# EAGLE board Etch Wallet - ground pour (EAGLE 9.6.1), part 1 of 2
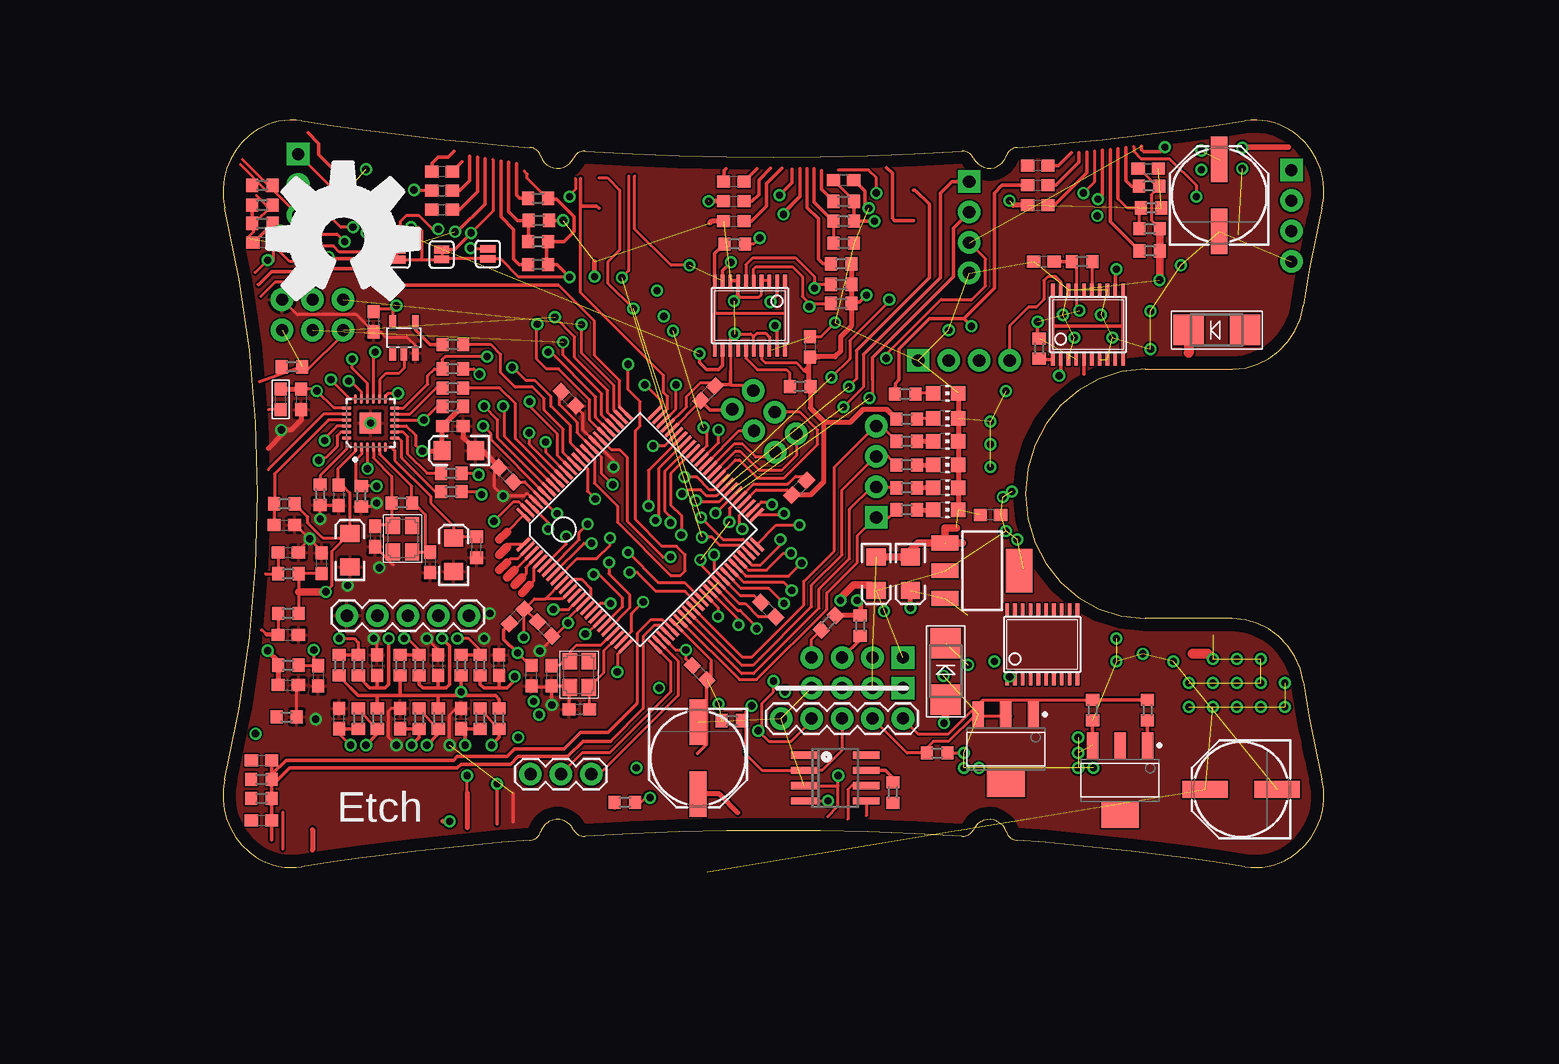
[diagram p0: board, top side]
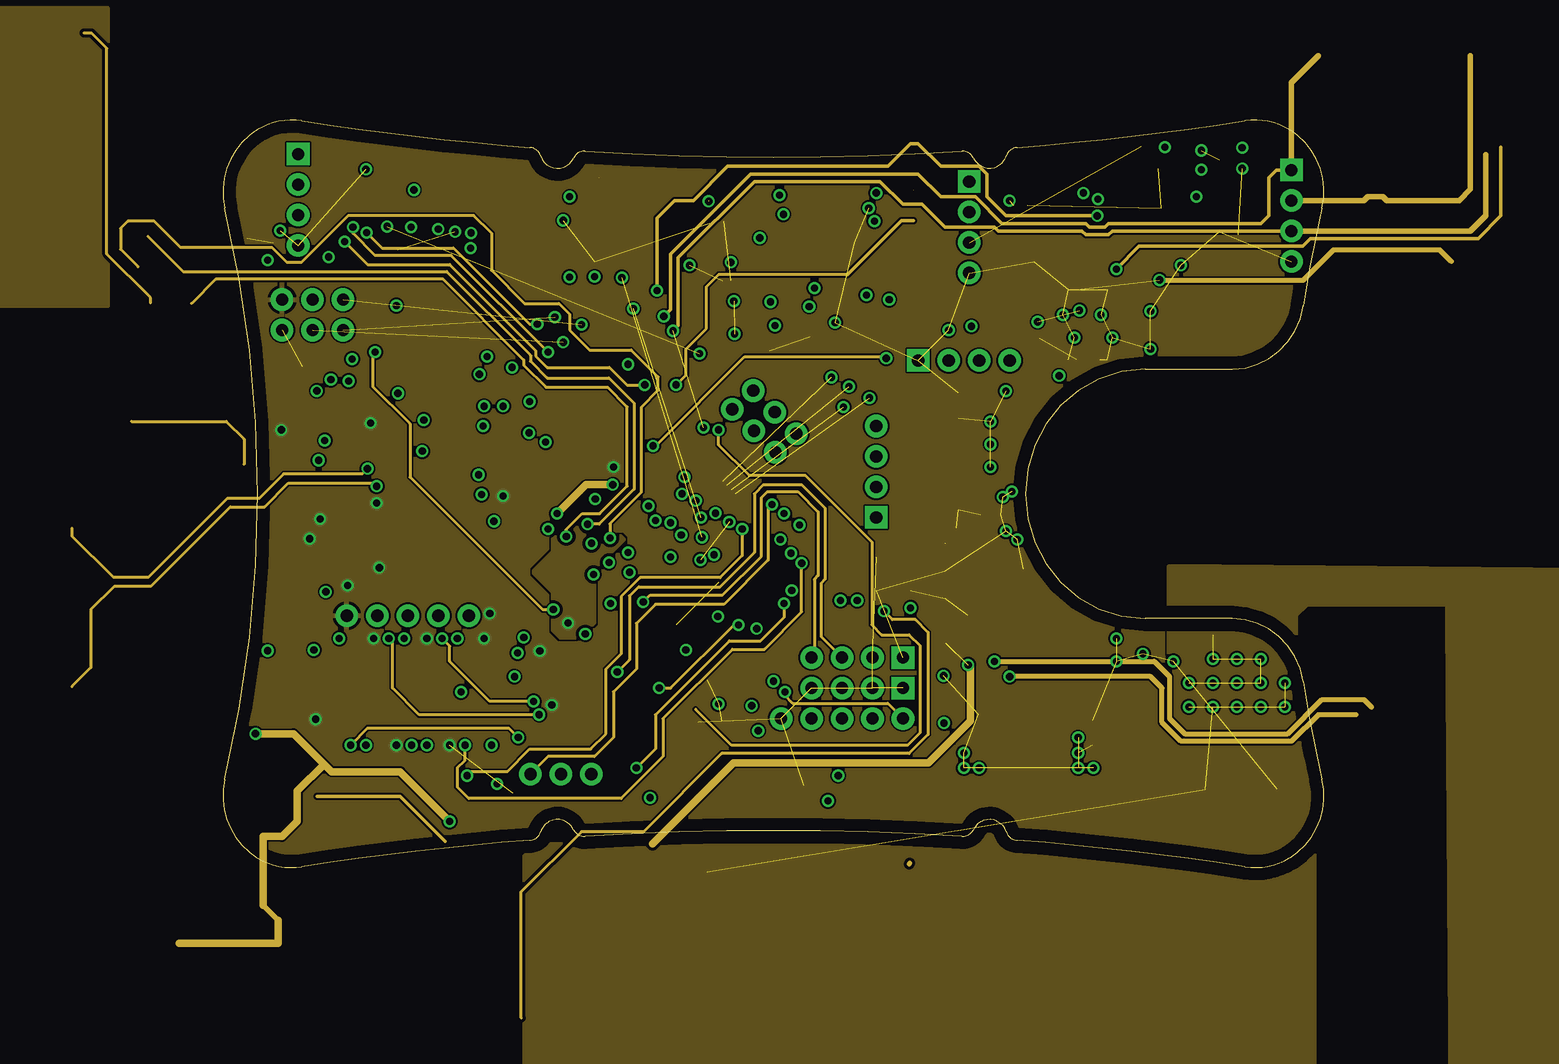
[diagram p1: board, inner layer Route2]
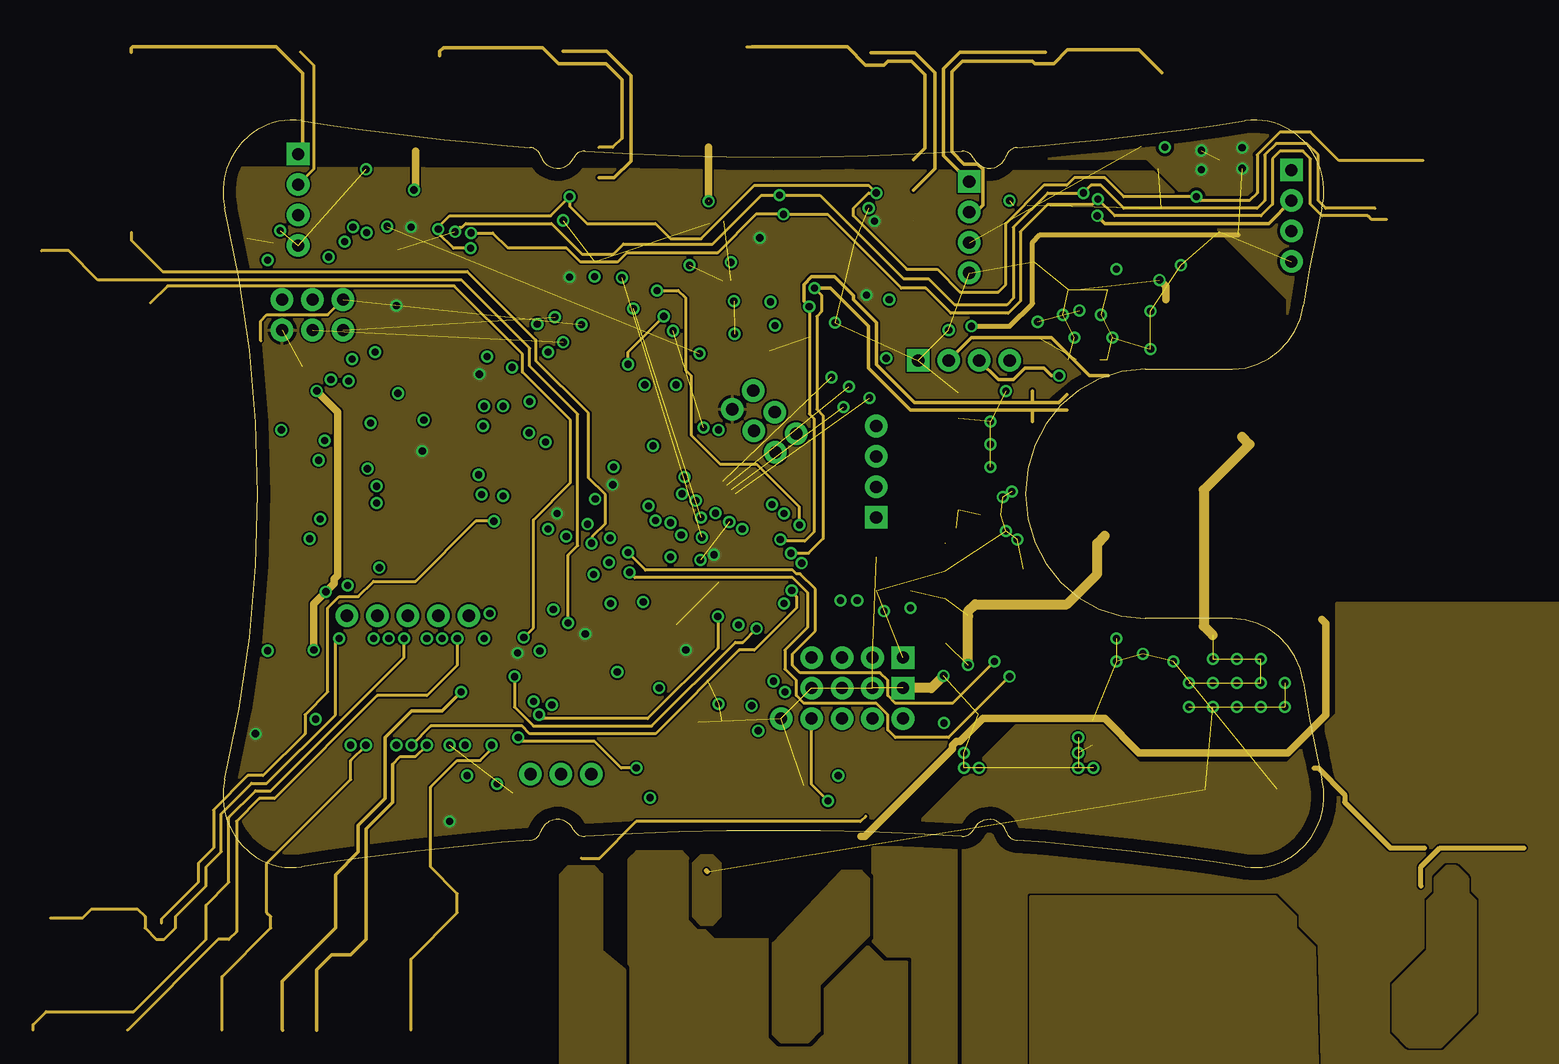
[diagram p2: board, inner layer Route15]
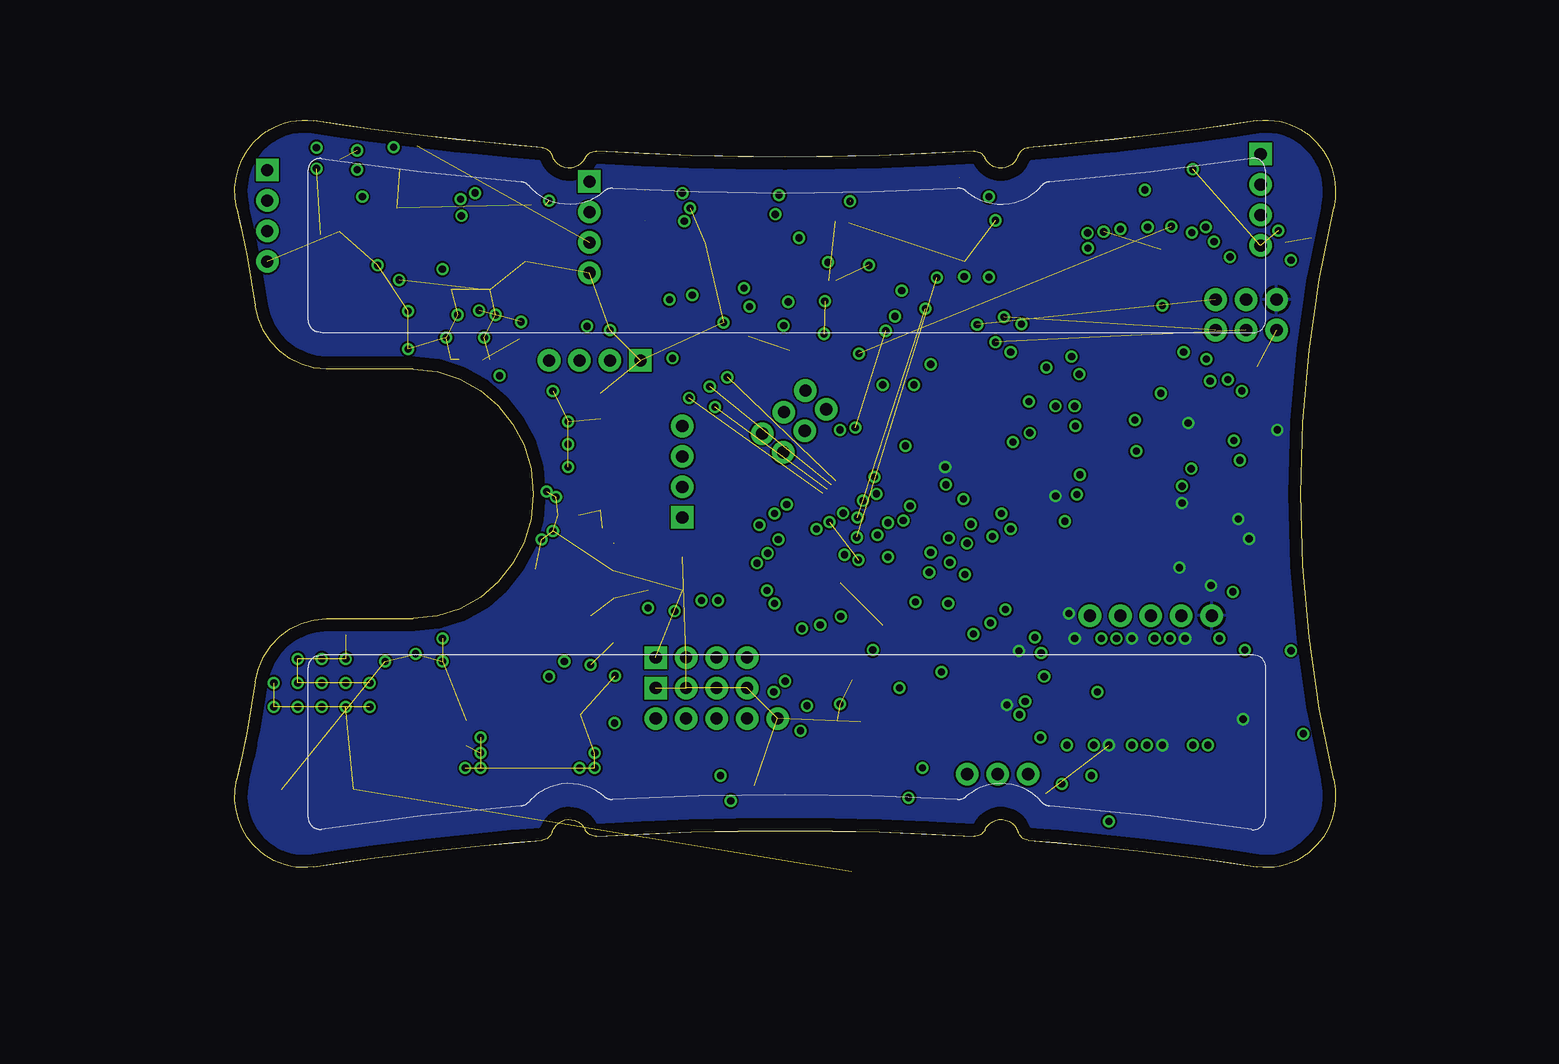
[diagram p3: board, bottom side, seen from below]

Size 91.76 x 62.31 mm. Coordinates in mm from the lower left corner, seen from the top.
Outline: 62.54,59.15 62.47,59.28 62.38,59.4 62.27,59.5 62.15,59.58 62.02,59.64 61.89,59.69 61.74,59.71 61.6,59.72 57.67,59.51 53.74,59.36 49.81,59.27 45.88,59.24 41.95,59.27 38.02,59.36 34.09,59.51 30.16,59.72 30.01,59.71 29.87,59.69 29.74,59.64 29.61,59.58 29.49,59.5 29.38,59.4 29.29,59.28 29.21,59.15 29.14,59.02 29.06,58.9 28.97,58.79 28.87,58.69 28.76,58.6 28.64,58.52 28.51,58.45 28.38,58.39 28.08,58.32 27.79,58.31 27.5,58.35 27.23,58.46 26.99,58.61 26.77,58.81 26.59,59.06 26.46,59.34 26.41,59.48 26.33,59.61 26.24,59.73 26.13,59.82 26.01,59.91 25.88,59.97 25.74,60.01 25.6,60.03 23.21,60.23 20.83,60.46 18.44,60.7 16.06,60.97 13.68,61.25 11.31,61.56 8.93,61.9 6.56,62.25 6.08,62.3 5.6,62.31 5.12,62.28 4.65,62.21 4.18,62.09 3.73,61.94 3.29,61.74 2.86,61.51 2.77,61.45 2.68,61.39 2.59,61.33 2.5,61.27 2.41,61.21 2.33,61.14 2.24,61.08 2.16,61.01 1.55,60.43 1.04,59.78 0.62,59.06 0.3,58.3 0.1,57.49 0,56.66 0.02,55.82 0.15,54.97 1.35,49.07 2.2,43.13 2.71,37.15 2.88,31.16 2.71,25.16 2.2,19.19 1.35,13.24 0.15,7.34 0.02,6.5 0,5.65 0.1,4.82 0.3,4.02 0.62,3.25 1.04,2.53 1.55,1.88 2.16,1.3 2.24,1.23 2.33,1.17 2.41,1.1 2.5,1.04 2.59,0.98 2.68,0.92 2.77,0.86 2.86,0.8 3.29,0.57 3.73,0.37 4.18,0.22 4.65,0.11 5.12,0.03 5.6,0 6.08,0.01 6.56,0.06 8.93,0.42 11.31,0.75 13.68,1.06 16.06,1.35 18.44,1.61 20.83,1.86 23.21,2.08 25.6,2.28 25.74,2.3 25.88,2.34 26.01,2.41 26.13,2.49 26.24,2.59 26.33,2.7 26.41,2.83 26.46,2.97 26.52,3.1 26.58,3.24 26.66,3.36 26.75,3.47 26.85,3.58 26.95,3.68 27.07,3.76 27.19,3.83 27.48,3.95 27.77,4 28.06,4 28.34,3.93 28.6,3.81 28.84,3.64 29.05,3.42 29.21,3.16 29.29,3.03 29.38,2.91 29.49,2.81 29.61,2.73 29.74,2.67 29.87,2.62 30.01,2.6 30.16,2.6 34.09,2.81 38.02,2.96 41.95,3.05 45.88,3.08 49.81,3.05 53.74,2.96 57.67,2.81 61.6,2.6 61.74,2.6 61.89,2.62 62.02,2.67 62.15,2.73 62.27,2.81 62.38,2.91 62.47,3.03 62.54,3.16 62.62,3.29 62.7,3.41 62.79,3.52 62.89,3.62 63,3.71 63.12,3.79 63.25,3.86 63.38,3.92 63.67,3.99 63.97,4 64.25,3.96 64.53,3.85 64.77,3.7 64.99,3.5 65.16,3.25 65.29,2.97 65.35,2.83 65.43,2.7 65.52,2.59 65.63,2.49 65.75,2.41 65.88,2.34 66.01,2.3 66.16,2.28 68.55,2.08 70.93,1.86 73.32,1.61 75.7,1.35 78.07,1.06 80.45,0.75 82.82,0.42 85.19,0.06 85.68,0.01 86.16,0 86.63,0.03 87.11,0.11 87.57,0.22 88.03,0.37 88.47,0.57 88.9,0.8 88.99,0.86 89.08,0.92 89.17,0.98 89.26,1.04 89.35,1.1 89.43,1.17 89.52,1.23 89.6,1.3 90.21,1.88 90.72,2.53 91.14,3.25 91.45,4.02 91.66,4.82 91.76,5.65 91.74,6.5 91.61,7.34 91.38,8.35 91.16,9.36 90.95,10.38 90.75,11.4 90.56,12.41 90.38,13.43 90.21,14.46 90.05,15.48 89.79,16.58 89.35,17.59 88.75,18.48 88.02,19.26 87.18,19.89 86.23,20.36 85.21,20.65 84.12,20.76 76.88,20.76 74.86,20.97 72.99,21.57 71.29,22.53 69.81,23.8 68.59,25.34 67.66,27.11 67.08,29.06 66.88,31.16 67.08,33.25 67.66,35.2 68.59,36.97 69.81,38.51 71.29,39.78 72.99,40.74 74.86,41.34 76.88,41.56 84.12,41.56 85.21,41.66 86.23,41.95 87.18,42.42 88.02,43.05 88.75,43.83 89.35,44.73 89.79,45.73 90.05,46.83 90.21,47.86 90.38,48.88 90.56,49.9 90.75,50.92 90.95,51.93 91.16,52.95 91.38,53.96 91.61,54.97 91.74,55.82 91.76,56.66 91.66,57.49 91.45,58.3 91.14,59.06 90.72,59.78 90.21,60.43 89.6,61.01 89.52,61.08 89.43,61.14 89.35,61.21 89.26,61.27 89.17,61.33 89.08,61.39 88.99,61.45 88.9,61.51 88.47,61.74 88.03,61.94 87.57,62.09 87.11,62.21 86.63,62.28 86.16,62.31 85.68,62.3 85.19,62.25 82.82,61.9 80.45,61.56 78.07,61.25 75.7,60.97 73.32,60.7 70.93,60.46 68.55,60.23 66.16,60.03 66.01,60.01 65.88,59.97 65.75,59.91 65.63,59.82 65.52,59.73 65.43,59.61 65.35,59.48 65.29,59.34 65.24,59.21 65.17,59.08 65.1,58.95 65.01,58.84 64.91,58.73 64.8,58.64 64.69,58.55 64.56,58.48 64.28,58.36 63.99,58.31 63.7,58.32 63.42,58.38 63.16,58.5 62.92,58.67 62.71,58.89 62.54,59.15
Copper layers (1*16): Top 0.035mm / dielectric 1.5mm / Bottom 0.035mm
Design rules "default": minimum track width 6mil, minimum drill 0.35mm, track to track 6mil, track to pad 6mil, pad to pad 6mil, via to via 6mil, smd to smd 6mil, copper to edge 40mil, drill to drill 6mil, minimum pad ring 10mil, minimum via ring 8mil, stop-mask expansion 4mil, vias tented up to drill 0mil, thermal gap 10mil

## Footprints (pad centres in the part's own frame; a part is rotated, then mirrored left to right if it is on the bottom)
C0603 = smd 1.1 x 1: 1 -0.85,0; 2 0.85,0
EIA3216 = smd 1.4 x 1.6: A 1.4,0; C -1.4,0
PANASONIC_E = smd 3.8 x 1.4: + 3,0; - -3,0
C0603K = smd 1.05 x 1.08: 1 -0.875,0; 2 0.875,0
SMADIODE = smd 2.54 x 2.54: A 2.349,0; C -2.349,0
0603 = smd 1.1 x 1: 1 -0.85,0; 2 0.85,0
LQFP100 = smd 0.27 x 1.5: 1 -6,-7.75; 2 -5.5,-7.75; 3 -5,-7.75; 4 -4.5,-7.75; 5 -4,-7.75; 6 -3.5,-7.75; 7 -3,-7.75; 8 -2.5,-7.75; 9 -2,-7.75; 10 -1.5,-7.75; 11 -1,-7.75; 12 -0.5,-7.75; 13 0,-7.75; 14 0.5,-7.75; 15 1,-7.75; 16 1.5,-7.75; 17 2,-7.75; 18 2.5,-7.75; 19 3,-7.75; 20 3.5,-7.75; 21 4,-7.75; 22 4.5,-7.75; 23 5,-7.75; 24 5.5,-7.75; 25 6,-7.75; 51 6,7.75; 52 5.5,7.75; 53 5,7.75; 54 4.5,7.75; 55 4,7.75; 56 3.5,7.75; 57 3,7.75; 58 2.5,7.75; 59 2,7.75; 60 1.5,7.75; 61 1,7.75; 62 0.5,7.75; 63 0,7.75; 64 -0.5,7.75; 65 -1,7.75; 66 -1.5,7.75; 67 -2,7.75; 68 -2.5,7.75; 69 -3,7.75; 70 -3.5,7.75; 71 -4,7.75; 72 -4.5,7.75; 73 -5,7.75; 74 -5.5,7.75; 75 -6,7.75 | smd 1.5 x 0.27: 26 7.75,-6; 27 7.75,-5.5; 28 7.75,-5; 29 7.75,-4.5; 30 7.75,-4; 31 7.75,-3.5; 32 7.75,-3; 33 7.75,-2.5; 34 7.75,-2; 35 7.75,-1.5; 36 7.75,-1; 37 7.75,-0.5; 38 7.75,0; 39 7.75,0.5; 40 7.75,1; 41 7.75,1.5; 42 7.75,2; 43 7.75,2.5; 44 7.75,3; 45 7.75,3.5; 46 7.75,4; 47 7.75,4.5; 48 7.75,5; 49 7.75,5.5; 50 7.75,6; 76 -7.75,6; 77 -7.75,5.5; 78 -7.75,5; 79 -7.75,4.5; 80 -7.75,4; 81 -7.75,3.5; 82 -7.75,3; 83 -7.75,2.5; 84 -7.75,2; 85 -7.75,1.5; 86 -7.75,1; 87 -7.75,0.5; 88 -7.75,0; 89 -7.75,-0.5; 90 -7.75,-1; 91 -7.75,-1.5; 92 -7.75,-2; 93 -7.75,-2.5; 94 -7.75,-3; 95 -7.75,-3.5; 96 -7.75,-4; 97 -7.75,-4.5; 98 -7.75,-5; 99 -7.75,-5.5; 100 -7.75,-6
TSSOP20 = smd 0.305 x 0.991: 1 -2.925,-2.918; 2 -2.275,-2.918; 3 -1.625,-2.918; 4 -0.975,-2.918; 5 -0.325,-2.918; 6 0.325,-2.918; 7 0.975,-2.918; 8 1.625,-2.918; 9 2.275,-2.918; 10 2.925,-2.918; 11 2.925,2.918; 12 2.275,2.918; 13 1.625,2.918; 14 0.975,2.918; 15 0.325,2.918; 16 -0.325,2.918; 17 -0.975,2.918; 18 -1.625,2.918; 19 -2.275,2.918; 20 -2.925,2.918
SOT23-5 = smd 0.55 x 1.2: 1 -0.95,-1.3; 2 0,-1.3; 3 0.95,-1.3; 4 0.95,1.3; 5 -0.95,1.3
QFN24_4MM = smd 0.8 x 0.28: 1 -2,1.25; 2 -2,0.75; 3 -2,0.25; 4 -2,-0.25; 5 -2,-0.75; 6 -2,-1.25; 13 2,-1.25; 14 2,-0.75; 15 2,-0.25; 16 2,0.25; 17 2,0.75; 18 2,1.25 | smd 0.28 x 0.8: 7 -1.25,-2; 8 -0.75,-2; 9 -0.25,-2; 10 0.25,-2; 11 0.75,-2; 12 1.25,-2; 19 1.25,2; 20 0.75,2; 21 0.25,2; 22 -0.25,2; 23 -0.75,2; 24 -1.25,2 | smd 1.778 x 1.778: THERM 0,0
SOT223 = smd 1.219 x 2.235: 1 -2.311,-3.099; 2 0,-3.099; 3 2.311,-3.099 | smd 3.6 x 2.2: 4 0,3.099
SOIC8 = smd 0.6 x 2.2: 1 -1.905,-2.6; 2 -0.635,-2.6; 3 0.635,-2.6; 4 1.905,-2.6; 5 1.905,2.6; 6 0.635,2.6; 7 -0.635,2.6; 8 -1.905,2.6
1X04_NO_SILK = drill 1.016 pad 1.88 square: 1 0,0 | drill 1.016 pad 1.88: 2 2.54,0; 3 5.08,0; 4 7.62,0
1X03_NO_SILK = drill 1.016 pad 1.88: 1 0,0; 2 2.54,0; 3 5.08,0
1X03 = drill 1.016 pad 1.88: 1 0,0; 2 2.54,0; 3 5.08,0
SJ_2S = smd 0.635 x 1.27: 1 -0.412,0; 2 0.412,0
1X05 = drill 1.016 pad 1.88: 1 0,0; 2 2.54,0; 3 5.08,0; 4 7.62,0; 5 10.16,0
CHIP-LED0805 = smd 1.2 x 1.2: A 0,-1.05; C 0,1.05
CRYSTAL_3.2X2.5 = smd 1.4 x 1.2: 1 -1.1,-0.8; 2 1.1,0.8; GND1 -1.1,0.8; GND2 1.1,-0.8
SOT230P700X160-4N = smd 2.15 x 0.95: 1 -2.9,2.3; 2 -2.9,0; 3 -2.9,-2.3 | smd 2.15 x 3.15: 4 2.9,0
R0603 = smd 1 x 1.1: 1 -0.85,0; 2 0.85,0

## Placement (x,y rotation side)
C2  12pF  [C0603]  27.4,15.98 270 top
C3  12pF  [C0603]  29.69,13.19 180 top
C4  18pF  [C0603]  3.21,8.93 0 top
C5  18pF  [C0603]  3.21,3.91 0 top
C6  .1uF  [C0603]  26.81,19.9 315 top
C7  10uF  [EIA3216]  54.45,24.49 270 top
C8  .1uF  [C0603]  48.04,31.66 225 top
C9  .1uF  [C0603]  45.43,21.5 135 top
C10  .1uF  [C0603]  39.72,16.23 135 top
C11  .1uF  [C0603]  23.59,32.74 315 top
C12  .1uF  [C0603]  28.8,39.09 135 top
C13  .1uF  [C0603]  25.7,15.99 90 top
C14  .1uF  [C0603]  40.42,39.54 225 top
C16  .22uF  [C0603]  18.26,54.84 0 top
C18  .1uF  [C0603]  18.26,56.43 0 top
C20  .1uF  [C0603]  18.26,58.02 180 top
C25  .1uF  [C0603]  3.33,52.11 180 top
C31  .1uF  [C0603]  48.93,43.41 270 top
C32  .22uF  [C0603]  42.58,53.89 0 top
C33  .22uF  [C0603]  67.91,55.22 0 top
C34  .1uF  [C0603]  42.58,55.54 0 top
C35  .1uF  [C0603]  67.91,56.87 0 top
C36  .1uF  [C0603]  42.58,57.19 180 top
C37  .1uF  [C0603]  67.91,58.52 180 top
C38  .1uF  [C0603]  51.72,57.32 0 top
C41  .1uF  [C0603]  77.12,58.27 0 top
C42  100uF  [PANASONIC_E]  83.04,56.04 90 top
C44  .1uF  [C0603]  12.54,45.51 270 top
C45  10uF  [EIA3216]  10.57,26.46 90 top
C46  .1uF  [C0603]  9.62,31.03 270 top
C47  .1uF  [C0603]  6.51,39.03 270 top
C48  1uF  [EIA3216]  19.21,26.08 90 top
C49  470pF  [C0603K]  21.11,26.71 270 top
C50  10uF  [EIA3216]  19.65,34.78 180 top
C51  .1uF  [C0603]  19.15,36.81 0 top
C52  .1uF  [C0603]  8.22,25.38 90 top
C53  .1uF  [C0603]  7.91,15.98 270 top
C54  18pF  [C0603]  5.11,28.55 0 top
C55  18pF  [C0603]  5.43,26.27 0 top
C56  18pF  [C0603]  5.43,15.22 0 top
C57  18pF  [C0603]  5.43,19.41 0 top
C58  12pF  [C0603]  17.24,25.44 270 top
C59  12pF  [C0603]  12.67,27.6 270 top
C60  100uF  [PANASONIC_E]  39.59,9.12 270 top
C63  100uF  [PANASONIC_E]  84.87,6.52 180 top
C64  10uF  [EIA3216]  57.31,24.49 270 top
C65  .1uF  [C0603]  63.97,29.4 180 top
C68  .1uF  [C0603]  68.42,50.52 0 top
C78  .1uF  [C0603]  12.86,16.87 90 top
C79  .1uF  [C0603]  17.94,16.87 90 top
C80  .1uF  [C0603]  23.02,16.87 90 top
C81  .1uF  [C0603]  9.68,12.42 90 top
C82  .1uF  [C0603]  14.76,12.42 90 top
C83  .1uF  [C0603]  19.84,12.42 90 top
D1  MBRA210LT3  [SMADIODE]  60.23,16.36 270 top
D2  MBRA210LT3  [SMADIODE]  82.84,44.81 0 top
FB1  [0603]  4.79,39.03 90 top
IC1  LPC1769  [LQFP100]  34.77,28.17 315 top
IC2  MCP44X1  [TSSOP20]  68.29,18.6 0 top
IC4  MCP44X1  [TSSOP20]  43.91,46.02 180 top
IC7  [SOT23-5]  15.08,44.17 0 top
IC8  [QFN24_4MM]  12.29,37.06 90 top
IC9  MCP44X1  [TSSOP20]  72.1,45.27 0 top
IC10  LM1117-3.3V  [SOT223]  63.28,24.74 270 top
IC14  TC4427  [SOIC8]  51.02,7.47 270 top
JP1  [1X04_NO_SILK]  56.67,17.5 180 top
JP2  [1X03_NO_SILK]  42.45,38.2 315 top
JP3  [1X03_NO_SILK]  47.78,36.17 135 top
JP4  [1X03_NO_SILK]  4.92,44.81 0 top
JP6  [1X03_NO_SILK]  10,47.35 180 top
JP7  [1X04_NO_SILK]  6.26,59.48 270 top
JP10  [1X04_NO_SILK]  56.67,14.96 180 top
JP15  [1X04_NO_SILK]  62.2,57.19 270 top
JP18  [1X04_NO_SILK]  89.06,58.14 270 top
JP20  [1X03]  30.7,7.79 180 top
JP29  [1X04_NO_SILK]  54.45,29.19 90 top
JP30  [SJ_2S]  18.21,51.11 270 top
JP31  [SJ_2S]  14.56,51.1 90 top
JP32  [1X05]  20.48,21 180 top
JP33  [1X05]  56.67,12.42 180 top
JP34  [1X04_NO_SILK]  57.94,42.27 0 top
JP36  [SJ_2S]  22.07,51.16 270 top
L1  [0603]  24.48,20.93 225 top
LED1  [CHIP-LED0805]  60.23,29.82 270 top
LED2  [CHIP-LED0805]  60.23,31.66 270 top
LED3  [CHIP-LED0805]  60.23,33.57 270 top
LED4  [CHIP-LED0805]  60.23,35.54 270 top
LED9  [CHIP-LED0805]  60.23,37.44 270 top
LED10  [CHIP-LED0805]  60.23,39.54 270 top
Q2  12MHz  [CRYSTAL_3.2X2.5]  29.69,16.11 90 top
Q3  25MHz  [CRYSTAL_3.2X2.5]  14.95,27.41 270 top
Q8  ZXMN4A06  [SOT230P700X160-4N]  65.25,9.88 270 top
Q9  ZXMN4A06  [SOT230P700X160-4N]  74.77,7.28 270 top
R2  10K  [R0603]  5.73,41.75 0 top
R4  100K  [R0603]  71.6,50.52 180 top
R5  2.2k  [R0603]  50.46,20.42 45 top
R6  2.2k  [R0603]  53.12,20.17 90 top
R8  33R  [R0603]  3.21,5.76 0 top
R9  33R  [R0603]  3.21,7.34 0 top
R10  1k  [R0603]  56.99,29.82 180 top
R11  1k  [R0603]  56.99,31.66 180 top
R12  1k  [R0603]  56.99,33.57 180 top
R13  1k  [R0603]  56.99,35.54 180 top
R18  33K  [R0603]  68.03,43.26 90 top
R22  NP  [R0603]  3.27,55.22 180 top
R23  NP  [R0603]  26.26,52.17 0 top
R24  10K  [R0603]  3.27,56.87 0 top
R26  10K  [R0603]  3.27,53.7 0 top
R27  10K  [R0603]  26.32,53.95 0 top
R28  10K  [R0603]  26.26,55.79 0 top
R29  10K  [R0603]  26.26,50.27 0 top
R30  33K  [R0603]  42.64,51.98 0 top
R35  2.2k  [R0603]  51.53,48.62 0 top
R36  2.2k  [R0603]  51.53,47.03 0 top
R37  100K  [R0603]  48.1,40.11 0 top
R38  NP  [R0603]  51.72,53.89 0 top
R39  NP  [R0603]  77.25,53.25 0 top
R40  10K  [R0603]  51.72,52.05 0 top
R41  10K  [R0603]  51.72,55.54 0 top
R42  10K  [R0603]  51.53,50.33 0 top
R43  10K  [R0603]  77.36,54.99 0 top
R44  10K  [R0603]  77.18,56.81 0 top
R45  10K  [R0603]  77.25,51.41 0 top
R50  330R  [R0603]  5.3,12.55 180 top
R51  22R  [R0603]  19.15,43.6 0 top
R52  1.5K  [R0603]  19.15,41.57 0 top
R53  10K  [R0603]  19.15,38.46 0 top
R54  49.9R  [R0603]  5.11,30.33 180 top
R55  49.9R  [R0603]  5.43,24.49 180 top
R56  49.9R  [R0603]  5.43,16.87 180 top
R57  49.9R  [R0603]  5.43,21.19 180 top
R58  22R  [R0603]  19.02,32.87 0 top
R59  22R  [R0603]  19.02,31.35 0 top
R60  22R  [R0603]  19.15,39.98 0 top
R62  10K  [R0603]  11.53,30.97 90 top
R63  12.1K  [R0603]  8.1,31.09 90 top
R64  1M  [R0603]  14.89,30.39 180 top
R69  22R  [R0603]  55.84,6.25 270 top
R71  10k  [R0603]  42.41,12.24 0 top
R72  10k  [R0603]  33.5,5.44 0 top
R74  10k  [R0603]  59.53,9.54 0 top
R75  22R  [R0603]  77.06,13.12 90 top
R76  10k  [R0603]  72.49,13.12 270 top
R77  1k  [R0603]  56.99,37.38 180 top
R78  8.2K  [R0603]  56.86,39.47 180 top
R92  5k6  [R0603]  11.27,16.87 270 top
R93  1k  [R0603]  9.68,16.87 270 top
R94  1k  [R0603]  14.76,16.87 270 top
R95  5k6  [R0603]  16.35,16.87 270 top
R96  1k  [R0603]  19.84,16.87 270 top
R97  5k6  [R0603]  21.43,16.87 270 top
R98  1k  [R0603]  12.86,12.42 90 top
R99  5k6  [R0603]  11.27,12.42 270 top
R100  1k  [R0603]  17.94,12.42 90 top
R101  5k6  [R0603]  16.35,12.42 270 top
R102  1k  [R0603]  23.02,12.42 90 top
R103  5k6  [R0603]  21.43,12.42 270 top
U$8  OSHW-LOGOH  [OSHW-LOGO-HUGE]  10,52.43 0 top

## Library data of the parts
C2-C6 C8-C14 C16 C18 C20 C25 C31-C38 C41 C68 C78-C83 = rcl
C7 C42 C45 C48 C50 C60 C64 IC10 JP1-JP4 JP6 JP7 JP10 JP15 JP18 JP20 JP29-JP34 JP36 L1 = SparkFun
C44 C46 C47 C49 C51-C59 C65 R2 R4-R6 R8-R13 R18 R22-R24 R26-R30 R35-R45 R50-R60 R62-R64 R69 R71 R72 R74-R78 R92-R103 = resistor
C63 = SparkFun-Capacitors
D1 D2 FB1 IC1 IC7 IC8 Q2 Q3 = microbuilder
IC2 IC4 IC9 = Geos
IC14 = custom_esorensen
LED1-LED4 LED9 LED10 = led
Q8 Q9 = ipc-7351-transistor
U$8 = logxen

## Nets
3.3V: C8.2 C9.2 C10.2 C11.2 C12.2 C13.2 C14.2 C31.2 C38.1 C44.1 C50.A C51.1 IC1.19 IC1.28 IC1.42 IC1.54 IC1.71 IC1.84 IC1.96 IC4.17 IC7.5 IC8.9 JP2.1 JP4.1 JP30.2 JP31.1 JP36.2 L1.2 R2.2 R23.2 R28.2 R29.2 R30.2 R35.2 R36.2 R37.2 R38.2 R41.2 R42.2 R52.2 R53.2 R77.2
5V: C64.A D1.C IC10.3
+5V: D2.A
AGND: C6.2 IC1.11 IC1.15
AVCC: C6.1 IC1.10 IC1.12 L1.1
DIR1: IC1.80 JP7.2
DIR2: IC1.49
DIR3: IC1.58
DIR4: IC1.56 JP15.2
DIR5: IC1.50 JP18.2
EN1: IC1.81 JP7.1
EN2: IC1.48
EN3: IC1.59
EN4: IC1.57 JP15.1
EN5: IC1.85 JP18.1
ENET_CRS: IC1.92 R60.2
ENET_MDC: IC1.87
ENET_MDIO: IC1.86
ENET_REF_CLK: IC1.88 R51.2
ENET_RX_ER: IC1.89
ENET_RXD0: IC1.91
ENET_RXD1: IC1.90
ENET_TX_EN: IC1.93
ENET_TXD0: IC1.95
ENET_TXD1: IC1.94
ETA_CURRENT: IC9.2 JP34.3
GND: C2.2 C3.2 C11.1 C12.1 C13.1 C44.2 C45.C C46.2 C47.2 C48.C C49.2 C50.C C51.2 C52.2 C53.2 C54.2 C55.2 C56.2 C57.2 C58.2 C59.2 C78.2 C79.2 C80.2 C81.2 C82.2 C83.2 IC1.83 IC1.97 IC7.3 IC8.THERM JP6.3 JP32.5 R50.1 R62.1 R63.1
ISP_BOOT: IC1.53
JTAG-RTCK: IC1.100
JTAG-TCK: IC1.5
JTAG-TDI: IC1.2
JTAG-TDO: IC1.1
JTAG-TMS: IC1.3
JTAG-TRST: IC1.4
LED1: IC1.32 JP29.1 R10.2
LED1/REGOFF: IC8.3
LED2: IC1.33 JP29.2 R11.2
LED2/NINTSEL: IC8.2 R62.2
LED3: IC1.34 JP29.3 R12.2
LED4: IC1.35 JP29.4 R13.2
MISO1: IC1.61 JP3.1
MOSFET_DRIVE: C60.+
MOSI1: IC1.60 JP3.2
MS1: JP31.2
MS2: JP30.1
MS3: JP36.1
N$1: C2.1 IC1.22 Q2.2
N$2: C3.1 IC1.23 Q2.1
N$3: C20.2
N$4: C20.1
N$5: IC14.7 R69.1
N$7: C18.2
N$13: IC4.15 R37.1
N$15: IC4.1 IC4.10 IC4.11 IC4.20 R30.1
N$16: LED10.A R78.1
N$17: R23.1 R27.1
N$18: Q9.4
N$21: C45.A C46.1 C47.1 C52.1 C53.1 FB1.2 IC8.1 IC8.19 R54.1 R55.1 R56.1 R57.1
N$22: C16.2
N$24: R28.1
N$25: C36.2
N$26: C36.1
N$27: C34.2
N$29: IC9.15 R4.1
N$35: R29.1
N$36: R42.1
N$37: R38.1 R40.1
N$38: C32.2
N$39: R45.1
N$40: R41.1
N$42: IC8.8 R58.1
N$43: C37.1
N$44: C35.2
N$53: R39.1 R43.1
N$54: C33.2
N$55: IC8.7 R59.1
N$56: IC9.1 IC9.10 IC9.11 IC9.20 R18.1
N$57: R44.1
N$63: IC8.11 R60.1
N$67: C59.1 IC8.4 Q3.1 R64.2
N$68: C58.1 IC8.5 Q3.2 R64.1
N$69: IC8.24 R63.2
N$74: Q8.1
N$75: Q9.1 R75.1
N$77: IC7.2 IC8.14
N$78: IC7.4 R51.1
N$80: LED9.A R77.1
N$82: C48.A C49.1 IC8.6
N$84: LED4.A R13.1
N$85: LED3.A R12.1
N$86: LED2.A R11.1
N$87: LED1.A R10.1
N$88: Q8.4
N$106: R22.2 R26.1
N$114: R94.1 R95.1
N$115: R93.2 R94.2 R96.2 R98.2 R100.2 R102.2
N$116: R96.1 R97.1
N$117: R98.1 R99.1
N$118: R102.1 R103.1
N$119: R100.1 R101.1
N$122: R92.1 R93.1
N$124: R5.2 R6.2
P0W: IC4.12
P1_22: IC1.36
P1_23: IC1.37
P1W: IC4.9
P2.6: JP33.1 R75.2 R76.1
P2.7: IC14.4 JP33.4
P2.9: IC1.64
P2W: IC4.19
P3W: IC4.2
PLAY: IC1.51
POT_SCL: IC1.47 IC4.5 R36.1
POT_SDA: IC1.46 IC4.6 R35.1
PW5: IC9.12
PWM0: JP33.2 R74.1
PWM1: IC14.2 JP33.3 R71.2
RD+: IC8.23
RD-: IC8.22
RESET: IC1.17
RSTOUT: IC1.14 IC8.15
RX_0: IC1.99
S$3: C41.1 C68.2 IC9.4 IC9.17 R4.2 R18.2 R39.2 R44.2 R45.2
S$4: C63.+
S$5: C16.1
S$6: C33.1 C41.2 R43.2
S$7: C7.C C8.1 C9.1 C10.1 C14.1 C31.1 C32.1 C38.2 C42.- C60.- C63.- C64.C C65.2 C68.1 IC1.31 IC1.41 IC1.55 IC1.72 IC4.3 IC4.4 IC4.7 IC4.8 IC4.13 IC4.16 IC4.18 IC9.3 IC9.7 IC9.8 IC9.13 IC9.16 IC9.18 IC10.1 IC14.3 JP1.2 JP3.3 JP10.1 JP10.2 JP10.3 JP10.4 JP15.4 JP18.4 JP33.5 JP34.1 LED1.C LED2.C LED3.C LED4.C LED9.C LED10.C Q8.3 Q9.3 R27.2 R40.2 R71.1 R74.2 R76.2
S$9: IC9.5
S$11: C37.2
S$13: R72.1
S$16: IC1.39
S$17: IC14.6
S$18: IC14.5
S$19: R72.2
S$20: C7.A C65.1 IC10.2 IC10.4 JP1.1
S$22: C55.1 R55.2
S$23: C25.2 R26.2
S$24: C57.1 R57.2
S$25: C25.1 R22.1
S$26: C5.1
S$28: R24.2
S$29: JP7.4
S$32: D2.C
S$34: FB1.1
S$36: IC8.18
S$37: IC8.16
S$38: IC8.17
S$39: C34.1
S$40: IC8.12 R52.1
S$41: C18.1
S$42: IC8.13
S$43: IC8.10 R53.1
S$44: R58.2
S$45: R59.2
S$46: IC1.98
S$47: IC1.82
S$48: C56.1 R56.2
S$49: IC1.66
S$50: IC1.67
S$51: IC1.68
S$52: IC1.69
S$55: IC1.20
S$56: IC1.21
SCK1: IC1.62 JP2.3
SCL: IC1.24 JP1.4 R5.1
SD_CD: IC1.52 JP20.3
SD_CS: IC1.79 JP4.2
SD_IRQ: IC1.27 JP20.1
SD_MISO: IC1.77 JP6.1
SD_MOSI: IC1.76 JP6.2
SD_SCK: IC1.78 JP4.3
SD_WP: IC1.26 JP20.2
SDA: IC1.25 JP1.3 R6.1
SSEL1: IC1.63 JP2.2
STP1: IC1.75 JP7.3
STP2: IC1.74
STP3: IC1.73
STP4: IC1.70 JP15.3
STP5: IC1.65 JP18.3
TD+: C54.1 IC8.21 R54.2
TD-: IC8.20
TH1: IC1.9
TH2: IC1.8
TH3: IC1.7
TH4: IC1.6
THETA_CURRENT: IC9.19 JP34.4
USB_D+: C5.2 IC1.29 R8.2
USB_D-: C4.2 IC1.30 R9.2
VBB: C35.1 C42.+ R78.2
VUSB: D1.A
X_MAX: C79.1 R95.2
X_MIN: C78.1 IC1.38 R92.2
Y_MAX: C81.1 IC1.43 R99.2
Y_MIN: C80.1 IC1.40 R97.2
Z_MAX: C83.1 IC1.45 R103.2
Z_MIN: C82.1 IC1.44 R101.2
ZETA_CURRENT: JP34.2